# EAGLE board Board (EAGLE 9.7.0)
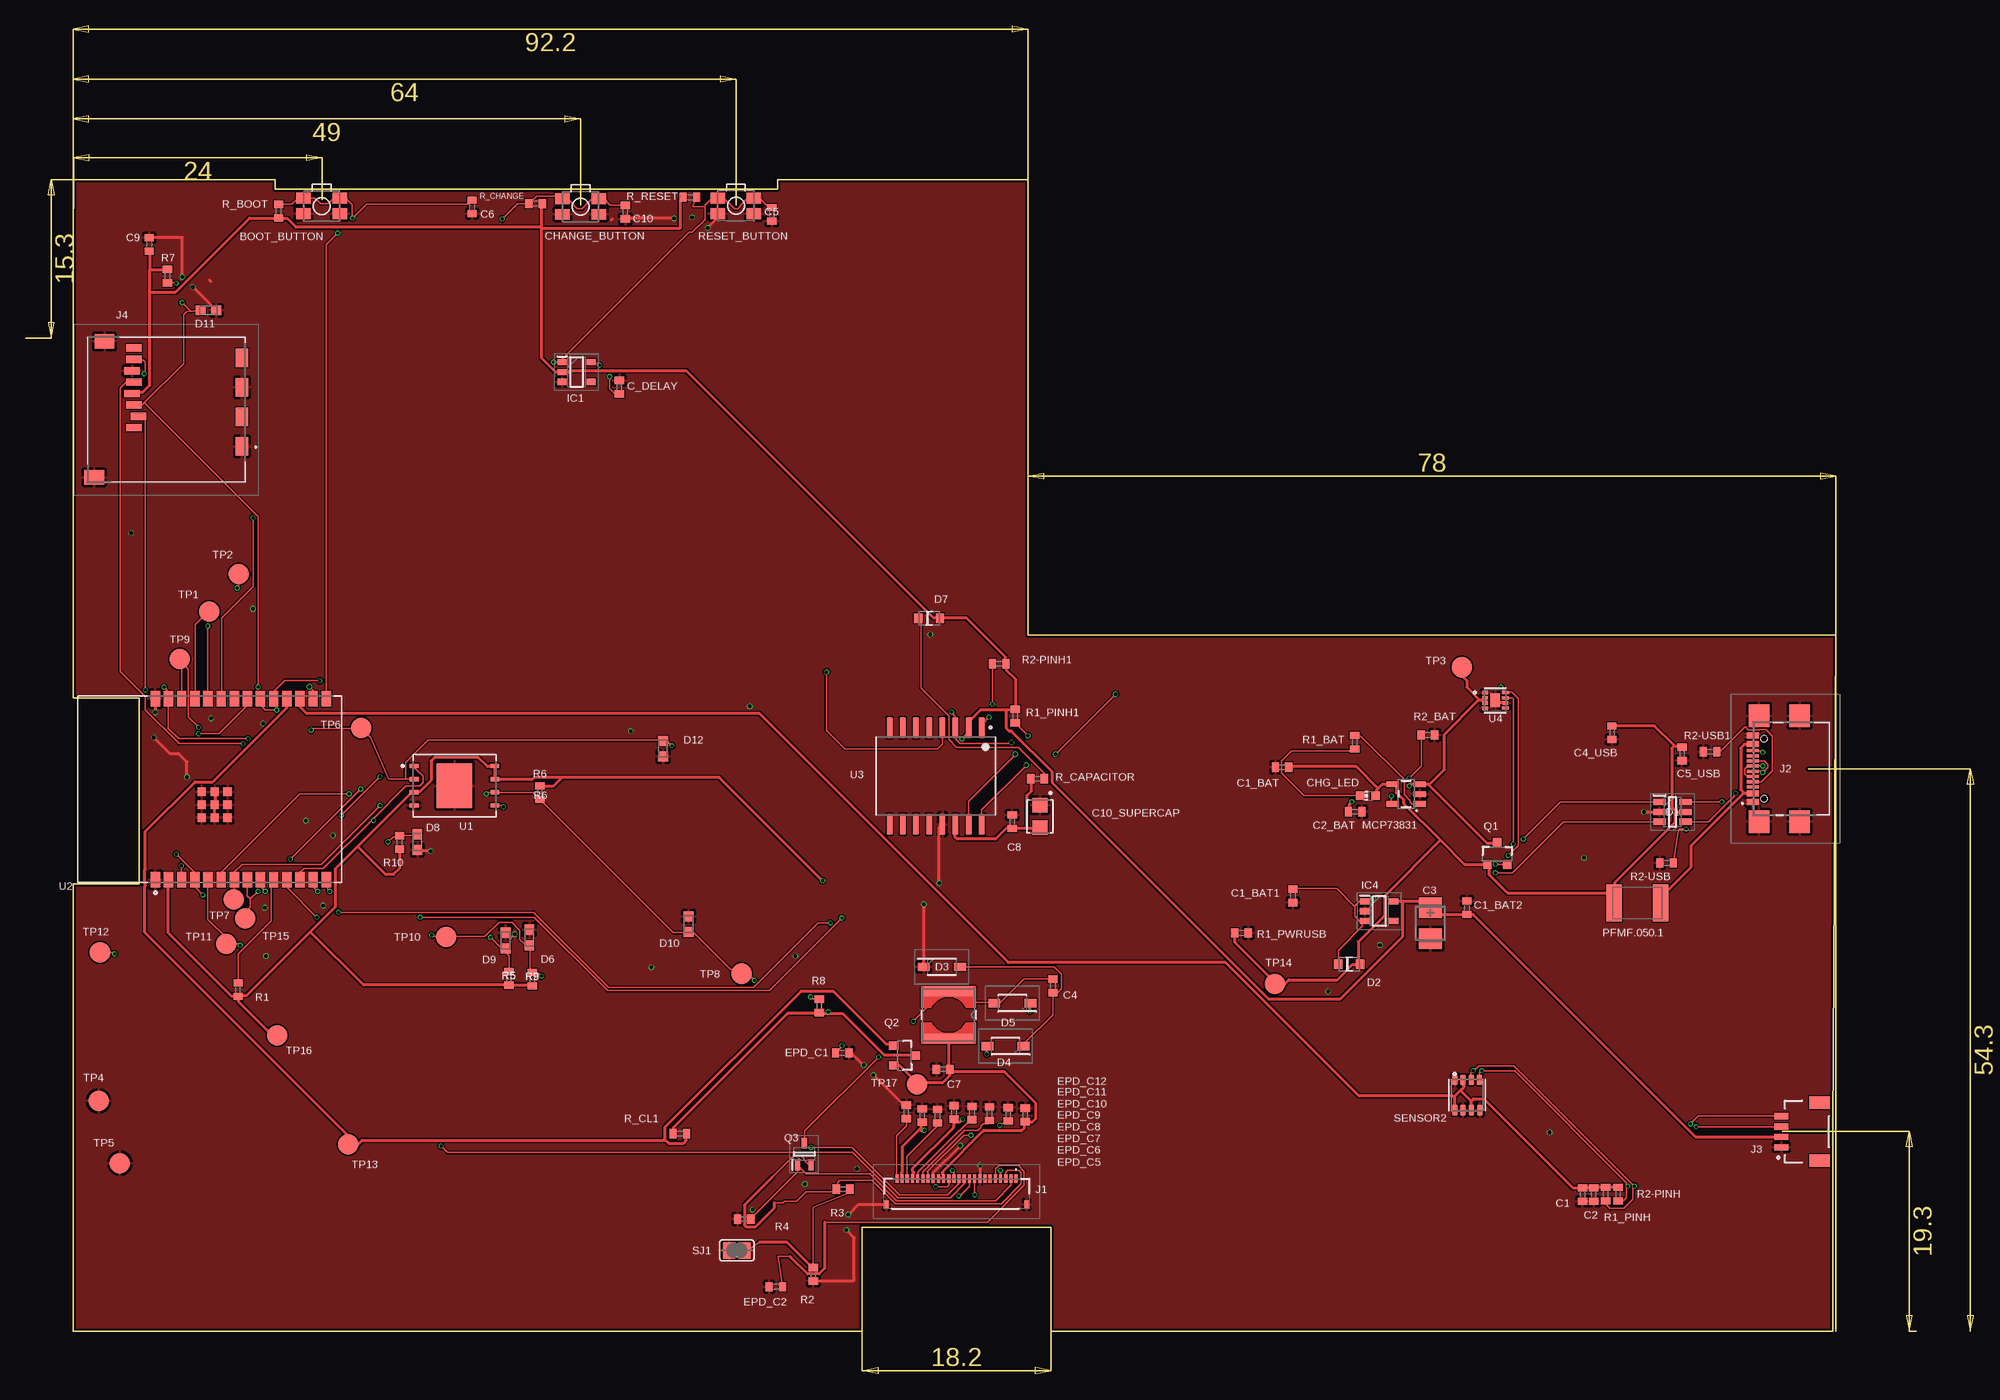
[diagram p0: board, top side]
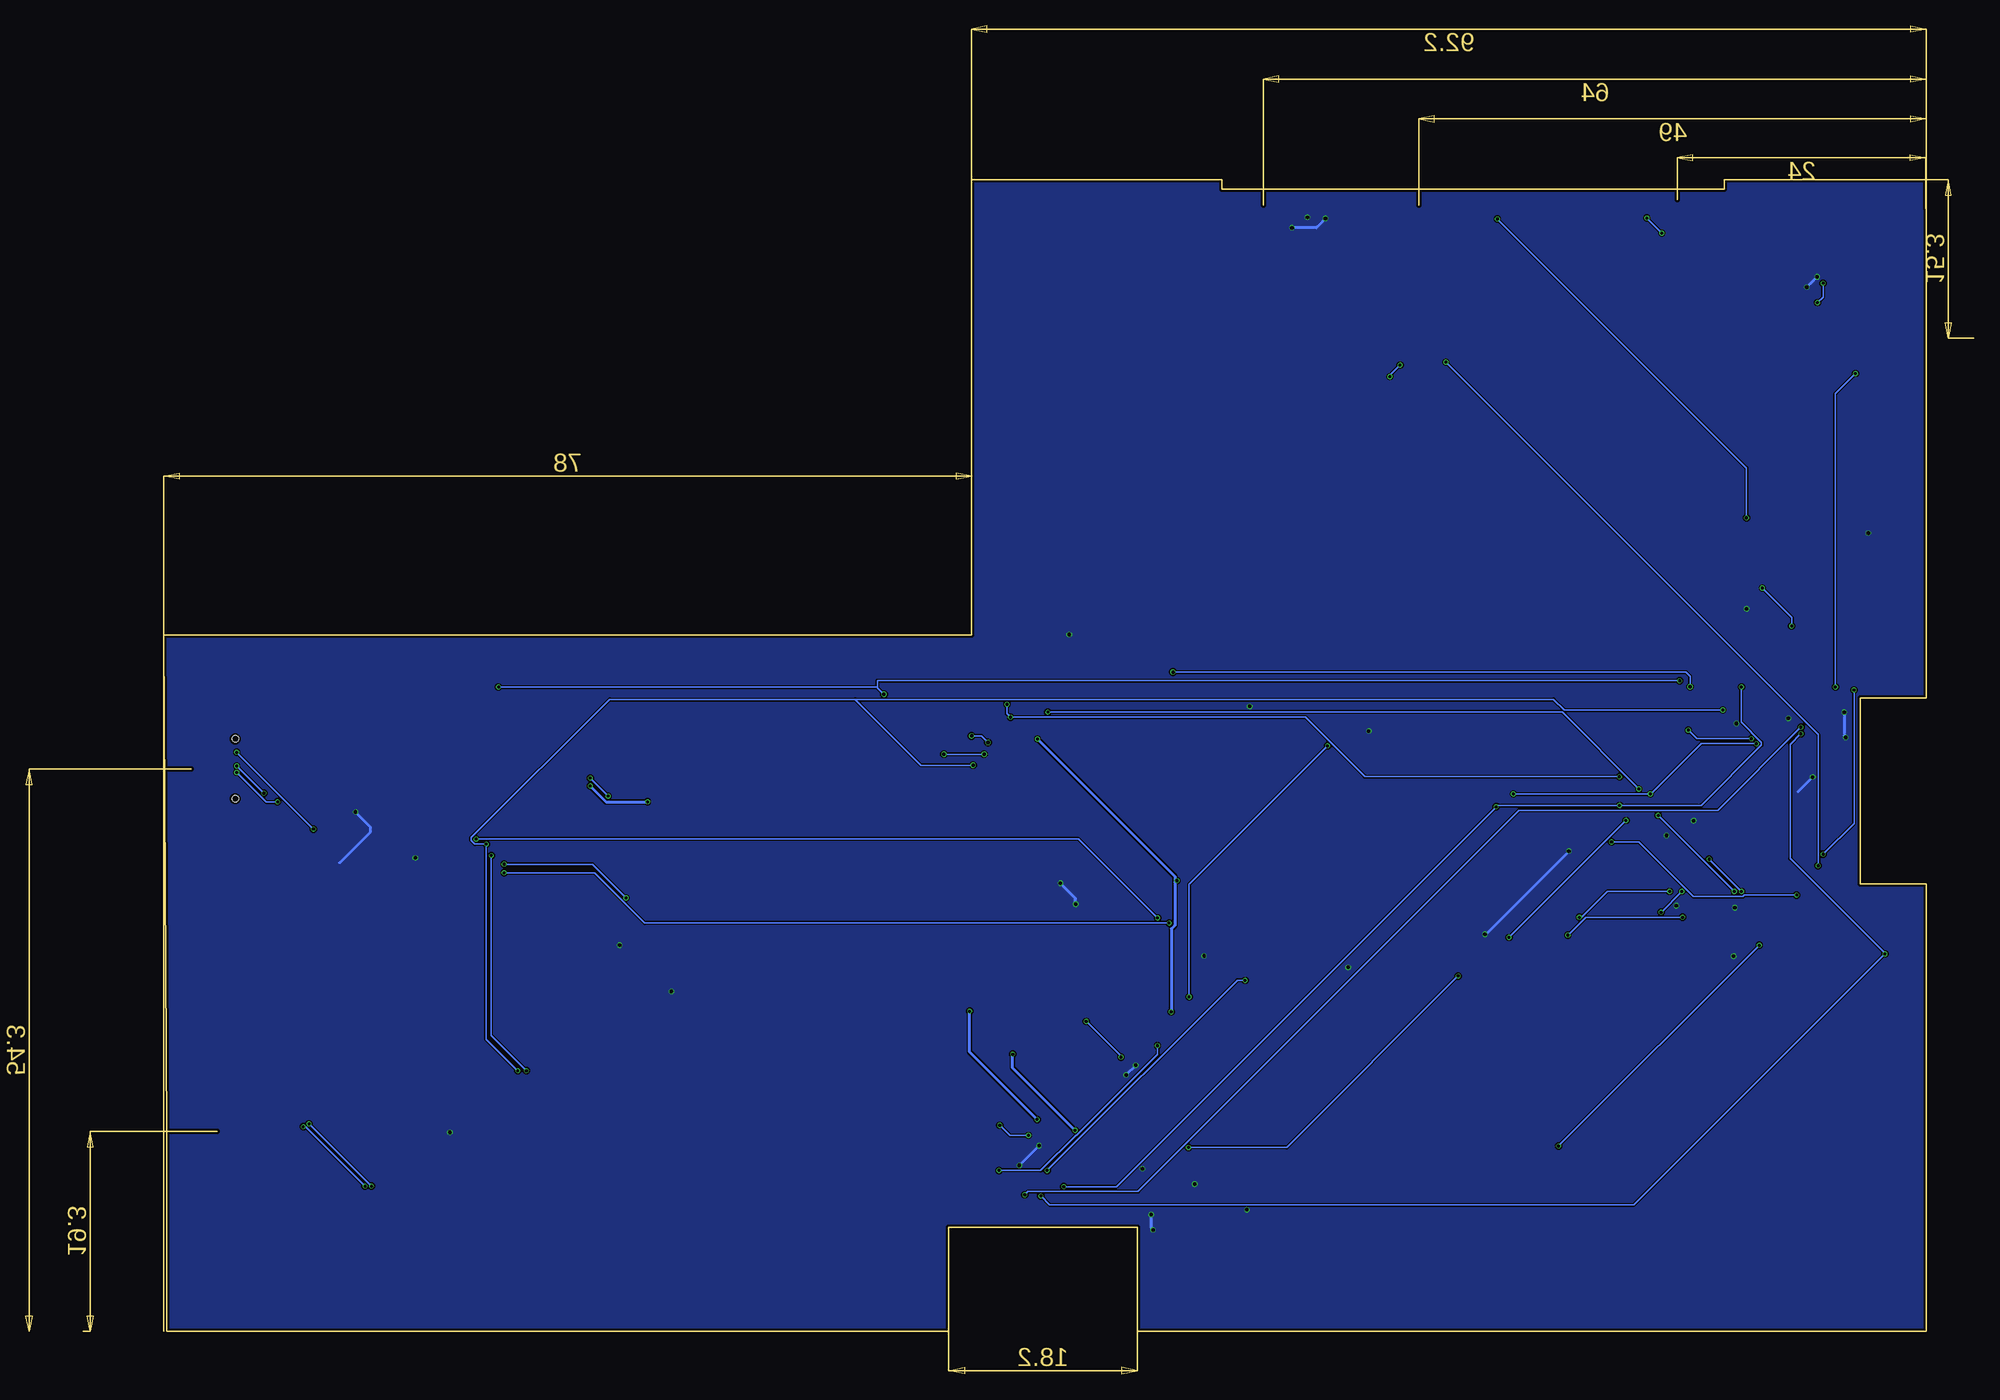
[diagram p1: board, bottom side, seen from below]

Size 170.2 x 111.2 mm. Coordinates in mm from the lower left corner, seen from the top.
Outline: 92.2,111.2 92.2,67.2 170.2,67.2 169.89,19.2 169.89,0 94.4,0 94.4,10 76.2,10 76.2,0 0,0 0,43.2 6.4,43.2 6.4,61.15 0,61.15 0,111.2 19.5,111.2 19.5,110.25 68,110.25 68,111.2 92.2,111.2
Copper layers (1*16): Top 0.035mm / dielectric 1.6mm / Bottom 0.035mm
Design rules "jlcpcb-2layers.dru": minimum track width 0.15mm, minimum drill 0.3mm, track to track 5mil, track to pad 5mil, pad to pad 5mil, via to via 5mil, smd to smd 5mil, copper to edge 0.2mm, drill to drill 6mil, minimum pad ring 10mil, minimum via ring 3mil, stop-mask expansion 4mil, vias tented up to drill 0mil, thermal gap 10mil
Net classes: 1 POWER: width 0.3 mm; 2 SIGNAL: width 0.15 mm

## Footprints (pad centres in the part's own frame; a part is rotated, then mirrored left to right if it is on the bottom)
MYBUTTON = smd 1.4 x 1.05: 1 1.75,0.75; 2 -1.75,0.75; 3 -1.75,-0.75; 4 1.75,-0.75
EAGLE-LTSPICE_C0402 = smd 0.7 x 0.9: 1 -0.65,0; 2 0.65,0
RCL_CT3528 = smd 2 x 2.2: + -1.5,0; - 1.5,0
CAPCP3225X100N = smd 1.4 x 1.4: 1 -1.1,0; 2 1.1,0
ADAFRUIT_CHIP-LED0603 = smd 0.8 x 0.8: A 0,-0.75; C 0,0.75
SOT95P280X145-6N = smd 1.2 x 0.6: 1 -1.25,0.95; 2 -1.25,0; 3 -1.25,-0.95; 4 1.25,-0.95; 5 1.25,0; 6 1.25,0.95
ESP32_WROVER_AVX---SD0805S020S1R0_AVX_SD0805S020S1R0_0 = smd 0.8 x 0.9: 1 -1.05,0; 2 1.05,0
SOD3716X135N = smd 1.15 x 0.8: 1 -1.75,0; 2 1.75,0
DIOC1608X36N = smd 0.97 x 0.94: 1 -0.75,0; 2 0.75,0
SOT95P280X125-5N = smd 0.9 x 0.6: 1 -1.4,0.95; 2 -1.4,0; 3 -1.4,-0.95; 4 1.4,-0.95; 5 1.4,0.95
SOT95P280X120-5N = smd 0.9 x 0.6: 1 -1.4,0.95; 2 -1.4,0; 3 -1.4,-0.95; 4 1.4,-0.95; 5 1.4,0.95
FH34SRJ24S05SH99 = smd 0.3 x 0.8: 1 5.75,1.45; 2 5.25,1.45; 3 4.75,1.45; 4 4.25,1.45; 5 3.75,1.45; 6 3.25,1.45; 7 2.75,1.45; 8 2.25,1.45; 9 1.75,1.45; 10 1.25,1.45; 11 0.75,1.45; 12 0.25,1.45; 13 -0.25,1.45; 14 -0.75,1.45; 15 -1.25,1.45; 16 -1.75,1.45; 17 -2.25,1.45; 18 -2.75,1.45; 19 -3.25,1.45; 20 -3.75,1.45; 21 -4.25,1.45; 22 -4.75,1.45; 23 -5.25,1.45; 24 -5.75,1.45 | smd 0.4 x 0.8: MP1 6.75,-1.05; MP2 -6.75,-1.05
SAMACSYS_PARTS_USB4110GFA = smd 0.3 x 1.15: A1 -3.35,3.678; A4 -2.55,3.678; A5 -1.25,3.678; A6 -0.25,3.678; A7 0.25,3.678; A8 1.25,3.678; A9 2.55,3.678; A12 3.35,3.678; B1 3.05,3.678; B4 2.25,3.678; B5 1.75,3.678; B6 0.75,3.678; B7 -0.75,3.678; B8 -1.75,3.678; B9 -2.25,3.678; B12 -3.05,3.678 | smd 2.18 x 2: MP1 -5.11,-0.827; MP2 5.11,-0.827; MP3 -5.11,3.103; MP4 5.11,3.103 | hole 0.65: -2.89,2.603; 2.89,2.603
JST04_1MM_RA = smd 0.6 x 1.35: 1 -1.5,0; 2 -0.5,0; 3 0.5,0; 4 1.5,0 | smd 1.2 x 2: NC1 2.8,-3.675; NC2 -2.8,-3.675
112ATAARR03ATTEND = smd 1.8 x 1.2: G1 10.6,10.4; G2 4.9,10.4; S1 7.75,10.4; S2 2.05,10.4 | smd 1.4 x 1.9: G3 13.6,-3.85; G4 0.45,-2.85 | smd 0.7 x 1.5: P1 8.8,0; P2 7.7,0.4; P3 6.6,0; P4 5.5,-0.2; P5 4.4,0; P6 3.3,-0.2; P7 2.2,0; P8 1.1,0
IND_4828-WE-TPC_WRE = smd 0.889 x 4.826: 1 -2.286,0; 2 2.286,0
ESP32_WROVER_SPARKFUN-IC-POWER_SOT23-5 = smd 0.55 x 1.2: 1 -0.95,-1.3; 2 0,-1.3; 3 0.95,-1.3; 4 0.95,1.3; 5 -0.95,1.3
ESP32C6_VARISTOR_CT/CN1812 = smd 1.5 x 3.6: 1 -2.25,0; 2 2.25,0
ESP32_WROVER_SPARKFUN-DISCRETESEMI_SOT23-3 = smd 0.8 x 0.9: 1 -0.95,-1; 2 0.95,-1; 3 0,1.1
SOT65P210X110-3N = smd 1.05 x 0.5: 1 -1.05,0.65; 2 -1.05,-0.65; 3 1.05,0
ESP32_WROVER_EAGLE-LTSPICE_R0402 = smd 0.7 x 0.9: 1 -0.65,0; 2 0.65,0
ESP32_WROVER_BME680_PSON80P300X300X100-8N = smd 1.016 x 0.5: 1 1.458,1.2; 2 1.458,0.4; 3 1.458,-0.4; 4 1.458,-1.2; 5 -1.458,-1.22; 6 -1.458,-0.4; 7 -1.458,0.4; 8 -1.458,1.2
SJ = smd 1.168 x 1.6: 1 -0.762,0; 2 0.762,0
TP20R = smd 2 x 2: TP 0,0
SON127P600X800X80-9N = smd 0.94 x 0.44: 1 -3.895,1.905; 2 -3.895,0.635; 3 -3.895,-0.635; 4 -3.895,-1.905; 5 3.895,-1.905; 6 3.895,-0.635; 7 3.895,0.635; 8 3.895,1.905 | smd 3.4 x 4.3: 9 0,0
XCVR_ESP32-C6-WROOM-1-N8 = smd 1.5 x 0.9: 1 -8.75,5.26; 2 -8.75,3.99; 3 -8.75,2.72; 4 -8.75,1.45; 5 -8.75,0.18; 6 -8.75,-1.09; 7 -8.75,-2.36; 8 -8.75,-3.63; 9 -8.75,-4.9; 10 -8.75,-6.17; 11 -8.75,-7.44; 12 -8.75,-8.71; 13 -8.75,-9.98; 14 -8.75,-11.25; 15 8.75,-11.25; 16 8.75,-9.98; 17 8.75,-8.71; 18 8.75,-7.44; 19 8.75,-6.17; 20 8.75,-4.9; 21 8.75,-3.63; 22 8.75,-2.36; 23 8.75,-1.09; 24 8.75,0.18; 25 8.75,1.45; 26 8.75,2.72; 27 8.75,3.99; 28 8.75,5.26 | smd 0.8 x 0.8: 29_1 -2.755,0.79; 29_2 -1.505,0.79; 29_3 -0.255,0.79; 29_4 -2.755,-0.46; 29_5 -1.505,-0.46; 29_6 -0.255,-0.46; 29_7 -2.755,-1.71; 29_8 -1.505,-1.71; 29_9 -0.255,-1.71
SOIC127P1032X265-16N = smd 2.05 x 0.59: 1 -4.655,4.445; 2 -4.655,3.175; 3 -4.655,1.905; 4 -4.655,0.635; 5 -4.655,-0.635; 6 -4.655,-1.905; 7 -4.655,-3.175; 8 -4.655,-4.445; 9 4.655,-4.445; 10 4.655,-3.175; 11 4.655,-1.905; 12 4.655,-0.635; 13 4.655,0.635; 14 4.655,1.905; 15 4.655,3.175; 16 4.655,4.445
SON50P200X200X80-9N = smd 0.6 x 0.35: 1 -0.985,0.75; 2 -0.985,0.25; 3 -0.985,-0.25; 4 -0.985,-0.75; 6 0.985,-0.25 | smd 0.76 x 0.27: 5 0.985,-0.75; 7 0.985,0.25; 8 0.985,0.75 | smd 0.9 x 1.3: 9 0,0

## Placement (x,y rotation side)
BOOT_BUTTON  BUTTON_CUSYOMV1  [MYBUTTON]  24,108.63 180 top
C1  100nF  [EAGLE-LTSPICE_C0402]  145.74,13.19 270 top
C1_BAT  4.7Uf  [EAGLE-LTSPICE_C0402]  116.73,54.46 180 top
C1_BAT1  4.7uF  [EAGLE-LTSPICE_C0402]  117.78,42.03 270 top
C1_BAT2  4.7uF  [EAGLE-LTSPICE_C0402]  134.57,40.88 90 top
C2  100nF  [EAGLE-LTSPICE_C0402]  146.82,13.19 270 top
C2_BAT  4.7uF  [EAGLE-LTSPICE_C0402]  123.79,50.16 0 top
C3  100uF TANT  [RCL_CT3528]  131.05,39.39 270 top
C4  4.7uF/25V  [EAGLE-LTSPICE_C0402]  94.61,33.33 90 top
C4_USB  100nF  [EAGLE-LTSPICE_C0402]  148.58,57.78 270 top
C5  1uF  [EAGLE-LTSPICE_C0402]  67.47,107.82 270 top
C5_USB  4.7uF  [EAGLE-LTSPICE_C0402]  155.34,55.73 270 top
C6  100nF  [EAGLE-LTSPICE_C0402]  38.54,108.54 270 top
C7  10uF  [EAGLE-LTSPICE_C0402]  84,25.28 180 top
C8  100nF  [EAGLE-LTSPICE_C0402]  90.68,49.19 90 top
C9  100nF  [EAGLE-LTSPICE_C0402]  7.36,104.94 90 top
C10  100nF  [EAGLE-LTSPICE_C0402]  53.34,108.04 270 top
C10_SUPERCAP  CPH3225A  [CAPCP3225X100N]  93.36,49.7 270 top
C_DELAY  100nF  [EAGLE-LTSPICE_C0402]  52.76,91.15 90 top
CHANGE_BUTTON  BUTTON_CUSYOMV1  [MYBUTTON]  49,108.58 180 top
CHG_LED  [ADAFRUIT_CHIP-LED0603]  125.03,51.7 90 top
D1  USBLC6-2SC6Y  [SOT95P280X145-6N]  154.43,50.13 0 top
D2  ESP32_WROVER_AVX---SD0805S020S1R0_AVX_SD0805S020S1R0_0_0AVX_SD0805S020S1R0_0_0  [ESP32_WROVER_AVX---SD0805S020S1R0_AVX_SD0805S020S1R0_0]  123.21,35.44 0 top
D3  MBR0530  [SOD3716X135N]  83.89,35.17 0 top
D4  MBR0530  [SOD3716X135N]  90.03,27.51 180 top
D5  MBR0530  [SOD3716X135N]  90.69,31.66 180 top
D6  PGB1010603MR  [DIOC1608X36N]  44.07,38.01 90 top
D7  ESP32_WROVER_AVX---SD0805S020S1R0_AVX_SD0805S020S1R0_0_0AVX_SD0805S020S1R0_0_0  [ESP32_WROVER_AVX---SD0805S020S1R0_AVX_SD0805S020S1R0_0]  82.66,68.84 0 top
D8  PGB1010603MR  [DIOC1608X36N]  33.26,47.23 270 top
D9  PGB1010603MR  [DIOC1608X36N]  41.76,37.72 90 top
D10  PGB1010603MR  [DIOC1608X36N]  59.44,39.31 90 top
D11  PGB1010603MR  [DIOC1608X36N]  13.08,98.57 0 top
D12  PGB1010603MR  [DIOC1608X36N]  56.96,56.25 270 top
EPD_C1  1uF/50V  [EAGLE-LTSPICE_C0402]  74.28,26.87 0 top
EPD_C2  1uF/50V  [EAGLE-LTSPICE_C0402]  67.86,4.28 180 top
EPD_C5  0.1uF/50V  [EAGLE-LTSPICE_C0402]  91.95,20.88 90 top
EPD_C6  1uF/50V  [EAGLE-LTSPICE_C0402]  90.28,20.94 90 top
EPD_C7  1uF/50V  [EAGLE-LTSPICE_C0402]  88.49,21 90 top
EPD_C8  1uF/50V  [EAGLE-LTSPICE_C0402]  86.8,21.06 90 top
EPD_C9  1uF/50V  [EAGLE-LTSPICE_C0402]  85.06,21.12 90 top
EPD_C10  1uF/50V  [EAGLE-LTSPICE_C0402]  83.46,20.76 90 top
EPD_C11  1uF/50V  [EAGLE-LTSPICE_C0402]  81.99,20.82 90 top
EPD_C12  1uF/50V  [EAGLE-LTSPICE_C0402]  80.45,21.18 90 top
IC1  BD5229G-TR  [SOT95P280X125-5N]  48.62,92.6 0 top
IC4  XC6220A331MR-G  [SOT95P280X120-5N]  126.11,40.55 0 top
J1  FH34SRJ-24S-0.5SH_99_  [FH34SRJ24S05SH99]  85.3,13.27 0 top
J2  SAMACSYS_PARTS_USB4110-GF-A  [SAMACSYS_PARTS_USB4110GFA]  165.88,54.3 90 top
J3  QWIIC_RIGHT_ANGLE  [JST04_1MM_RA]  164.94,19.25 90 top
J4  112A-TAAR-R03_ATTEND  [112ATAARR03ATTEND]  5.9,96.03 270 top
L1  744043680IND_4828-WE-TPC_WRE  [IND_4828-WE-TPC_WRE]  84.54,30.53 270 top
MCP73831  ESP32_WROVER_SPARKFUN-IC-POWER_MCP73831  [ESP32_WROVER_SPARKFUN-IC-POWER_SOT23-5]  128.72,51.85 90 top
PFMF.050.1  ESP32C6_VARISTORCN1812  [ESP32C6_VARISTOR_CT/CN1812]  151.03,41.34 180 top
Q1  20V/4.2A/52mΩ/1.4W  [ESP32_WROVER_SPARKFUN-DISCRETESEMI_SOT23-3]  137.51,46.06 0 top
Q2  20V/4.2A/52mΩ/1.4W  [ESP32_WROVER_SPARKFUN-DISCRETESEMI_SOT23-3]  80.25,26.61 270 top
Q3  SI1308EDL-T1-GE3  [SOT65P210X110-3N]  70.6,17.1 90 top
R1  10K  [ESP32_WROVER_EAGLE-LTSPICE_R0402]  15.94,32.96 90 top
R1_BAT  200  [ESP32_WROVER_EAGLE-LTSPICE_R0402]  123.75,56.86 270 top
R1_PINH  10K  [ESP32_WROVER_EAGLE-LTSPICE_R0402]  147.96,13.23 90 top
R1_PINH1  10K  [ESP32_WROVER_EAGLE-LTSPICE_R0402]  90.96,59.4 90 top
R1_PWRUSB  100K  [ESP32_WROVER_EAGLE-LTSPICE_R0402]  112.82,38.45 180 top
R2  2.2  [ESP32_WROVER_EAGLE-LTSPICE_R0402]  71.47,5.49 90 top
R2-PINH  10K  [ESP32_WROVER_EAGLE-LTSPICE_R0402]  149.17,13.23 90 top
R2-PINH1  10K  [ESP32_WROVER_EAGLE-LTSPICE_R0402]  89.43,64.45 0 top
R2-USB  5K1  [ESP32_WROVER_EAGLE-LTSPICE_R0402]  153.86,45.21 180 top
R2-USB1  5K1  [ESP32_WROVER_EAGLE-LTSPICE_R0402]  158.05,55.93 0 top
R2_BAT  2K  [ESP32_WROVER_EAGLE-LTSPICE_R0402]  130.81,57.56 180 top
R3  0.47  [ESP32_WROVER_EAGLE-LTSPICE_R0402]  74.35,13.7 180 top
R4  10k  [ESP32_WROVER_EAGLE-LTSPICE_R0402]  64.8,10.82 180 top
R5  10K  [ESP32_WROVER_EAGLE-LTSPICE_R0402]  42.08,34.06 270 top
R6  10K  [ESP32_WROVER_EAGLE-LTSPICE_R0402]  45.08,51.99 90 top
R7  10K  [ESP32_WROVER_EAGLE-LTSPICE_R0402]  9.11,101.86 90 top
R8  10K  [ESP32_WROVER_EAGLE-LTSPICE_R0402]  72.05,31.4 270 top
R9  10K  [ESP32_WROVER_EAGLE-LTSPICE_R0402]  44.36,33.98 270 top
R10  10K  [ESP32_WROVER_EAGLE-LTSPICE_R0402]  31.53,47.19 270 top
R_BOOT  10K  [ESP32_WROVER_EAGLE-LTSPICE_R0402]  19.86,108.13 90 top
R_CAPACITOR  15  [ESP32_WROVER_EAGLE-LTSPICE_R0402]  93.12,53.35 0 top
R_CHANGE  10K  [ESP32_WROVER_EAGLE-LTSPICE_R0402]  44.67,108.86 179.6 top
R_CL1  10K  [ESP32_WROVER_EAGLE-LTSPICE_R0402]  58.59,19.06 0 top
R_RESET  10K  [ESP32_WROVER_EAGLE-LTSPICE_R0402]  59.56,109.49 0 top
RESET_BUTTON  BUTTON_CUSYOMV1  [MYBUTTON]  64,108.65 180 top
SENSOR2  ESP32_WROVER_BME680_BME680  [ESP32_WROVER_BME680_PSON80P300X300X100-8N]  134.6,22.8 90 top
SJ1  [SJ]  64.09,7.79 0 top
TP1  TPTP20R  [TP20R]  13.14,69.47 19.4 top
TP2  TPTP20R  [TP20R]  15.99,73.12 0 top
TP3  TPTP20R  [TP20R]  134.07,64.1 0 top
TP4  TPTP20R  [TP20R]  2.47,22.22 0 top
TP5  TPTP20R  [TP20R]  4.52,16.22 0 top
TP6  TPTP20R  [TP20R]  27.84,58.23 0 top
TP7  TPTP20R  [TP20R]  15.51,41.67 0 top
TP8  TPTP20R  [TP20R]  64.53,34.52 90 top
TP9  TPTP20R  [TP20R]  10.3,64.91 173.9 top
TP10  TPTP20R  [TP20R]  36.02,38.08 0 top
TP11  TPTP20R  [TP20R]  14.77,37.39 0 top
TP12  TPTP20R  [TP20R]  2.6,36.57 0 top
TP13  TPTP20R  [TP20R]  26.58,18.02 0 top
TP14  TPTP20R  [TP20R]  116.03,33.52 0 top
TP15  TPTP20R  [TP20R]  16.61,39.83 0 top
TP16  TPTP20R  [TP20R]  19.7,28.54 0 top
TP17  TPTP20R  [TP20R]  81.49,23.84 0 top
U1  W25Q512JVEIQ  [SON127P600X800X80-9N]  36.83,52.66 0 top
U2  ESP32-C6-WROOM-1-N8  [XCVR_ESP32-C6-WROOM-1-N8]  13.21,52.33 90 top
U3  DS3231SN#  [SOIC127P1032X265-16N]  83.29,53.6 270 top
U4  MAX17048G+T10  [SON50P200X200X80-9N]  137.31,60.9 0 top

## Library data of the parts
BOOT_BUTTON CHANGE_BUTTON CHG_LED PFMF.050.1 RESET_BUTTON SJ1 TP1-TP17 = DeskAssistant v19 v1
C1 C1_BAT C1_BAT1 C1_BAT2 C2 C2_BAT C4 C4_USB C5 C5_USB C6-C10 C_DELAY EPD_C1 EPD_C2 EPD_C5-EPD_C12 = DeskAssistant v19 v1; SPICEMODEL: NONE; SPICEPREFIX: C
C3 = DeskAssistant v19 v1; SPICEPREFIX: C
C10_SUPERCAP = DeskAssistant v19 v1; AVAILABILITY: Not in stock; CHECK_PRICES: https://www.snapeda.com/parts/CPH3225A/Seiko+Instruments/view-part/?ref=eda; DESCRIPTION: 11 mF (EDLC) Supercapacitor 3.3 V 1210 (3225 Metric) - -; MF: Seiko Instruments; MP: CPH3225A; PACKAGE: 1210 Seiko; PRICE: None; PURCHASE-URL: https://www.snapeda.com/api/url_track_click_mouser/?unipart_id=562593&manufacturer=Seiko Instruments&part_name=CPH3225A&search_term=None; SNAPEDA_LINK: https://www.snapeda.com/parts/CPH3225A/Seiko+Instruments/view-part/?ref=snap
D1 = DeskAssistant v19 v1; AVAILABILITY: In Stock; CHECK_PRICES: https://www.snapeda.com/parts/USBLC6-2SC6Y/STMicroelectronics/view-part/?ref=eda; DESCRIPTION: 17V Clamp 5A (8/20µs) Ipp Tvs Diode Surface Mount SOT-23-6; MF: STMicroelectronics; MP: USBLC6-2SC6Y; PACKAGE: SOT-23-6 STMicroelectronics; PRICE: None; SNAPEDA_LINK: https://www.snapeda.com/parts/USBLC6-2SC6Y/STMicroelectronics/view-part/?ref=snap
D2 D7 = DeskAssistant v19 v1; CENTROID_NOT_SPECIFIED: No; DATASHEET: http://datasheets.avx.com/schottky.pdf; DIGIKEY_DESCRIPTION: DIODE SCHOTTKY 20V 1A 0805; DIGIKEY_PART_NUMBER: 478-7800-1-ND; LEAD_FREE: yes; MF: AVX; MOUSER_PART_NUMBER: 581-SD0805S020S1R0; PACKAGE: 0805 (2012 metric); PREFIX: D; ROHS: yes; TEMPERATURE_RANGE_HIGH: +125°C; TEMPERATURE_RANGE_LOW: -55°C
D3-D5 = DeskAssistant v19 v1; AVAILABILITY: In Stock; CHECK_PRICES: https://www.snapeda.com/parts/MBR0530/Onsemi/view-part/?ref=eda; DESCRIPTION: Diode Schottky 30 V 500mA Surface Mount SOD-123; MF: ON Semiconductor; MP: MBR0530; PACKAGE: SOD-123-2 ON Semiconductor; PRICE: None; PURCHASE-URL: https://www.snapeda.com/api/url_track_click_mouser/?unipart_id=179458&manufacturer=ON Semiconductor&part_name=MBR0530&search_term=None; SNAPEDA_LINK: https://www.snapeda.com/parts/MBR0530/Onsemi/view-part/?ref=snap
D6 D8-D12 = DeskAssistant v19 v1; AVAILABILITY: In Stock; CHECK_PRICES: https://www.snapeda.com/parts/PGB1010603MR/Littelfuse/view-part/?ref=eda; DESCRIPTION: 150V (Typ) Clamp - Ipp Tvs Diode Surface Mount 0603 (1608 Metric); MF: Littelfuse Inc.; MP: PGB1010603MR; PACKAGE: 0603 Littelfuse Inc.; PRICE: None; PURCHASE-URL: https://www.snapeda.com/api/url_track_click_mouser/?unipart_id=5659453&manufacturer=Littelfuse Inc.&part_name=PGB1010603MR&search_term=None; SNAPEDA_LINK: https://www.snapeda.com/parts/PGB1010603MR/Littelfuse/view-part/?ref=snap
IC1 = DeskAssistant v19 v1; DESCRIPTION: Voltage Detector with Adjustable Delay Time: CMOS processes are utilized to develop high precision, low current consumption CMOS reset ICs that allow arbitrary setting of the delay time. The extensive lineup includes both Nch Open Drain and CMOS output types in a wide range of detection voltages (from 2.3V to 6.0V, in 0.1V steps), enabling selection of the ideal solution based on customer requirements. In addition, the entire series is of course both lead-free and RoHS-compliant.; HEIGHT: 1.25mm; MANUFACTURER_NAME: ROHM Semiconductor; MANUFACTURER_PART_NUMBER: BD5229G-TR; MOUSER_PART_NUMBER: 755-BD5229G-TR; MOUSER_PRICE-STOCK: https://www.mouser.co.uk/ProductDetail/ROHM-Semiconductor/BD5229G-TR?qs=4kLU8WoGk0vvnhrrYwdszw%3D%3D
IC4 = DeskAssistant v19 v1; DESCRIPTION: LDO Voltage Regulators; HEIGHT: 1.2mm; MANUFACTURER_NAME: Torex; MANUFACTURER_PART_NUMBER: XC6220A331MR-G; MOUSER_PART_NUMBER: 865-XC6220A331MR-G; MOUSER_PRICE-STOCK: https://www.mouser.co.uk/ProductDetail/Torex-Semiconductor/XC6220A331MR-G?qs=AsjdqWjXhJ8ZSWznL1J0gg%3D%3D
J1 = DeskAssistant v19 v1; DESCRIPTION: 24 Position FFC, FPC Connector Contacts, Top and Bottom 0.020" (0.50mm) Surface Mount, Right Angle; HEIGHT: 1.1mm; MANUFACTURER_NAME: Hirose; MANUFACTURER_PART_NUMBER: FH34SRJ-24S-0.5SH(99); MOUSER_PART_NUMBER: 798-FH34SRJ24S05SH99; MOUSER_PRICE-STOCK: https://www.mouser.co.uk/ProductDetail/Hirose-Connector/FH34SRJ-24S-0.5SH99?qs=vcbW%252B4%252BSTIpKBl5ap9J8Fw%3D%3D
J2 = DeskAssistant v19 v1; DESCRIPTION: CONN USB 2.0 TYPE-C R/A SMT; HEIGHT: 3.26mm; MANUFACTURER_NAME: GCT (GLOBAL CONNECTOR TECHNOLOGY); MANUFACTURER_PART_NUMBER: USB4110-GF-A; MOUSER_PART_NUMBER: 640-USB4110-GF-A; MOUSER_PRICE-STOCK: https://www.mouser.co.uk/ProductDetail/GCT/USB4110-GF-A?qs=KUoIvG%2F9IlYiZvIXQjyJeA%3D%3D
J3 = DeskAssistant v19 v1; PROD_ID: CONN-13694
J4 = DeskAssistant v19 v1; DESCRIPTION: Micro SD Card Socket, Push-Push Type, Top Mount, SMT, H=1.83mm, 10u; HEIGHT: 1.9mm; MANUFACTURER_NAME: ATTEND; MANUFACTURER_PART_NUMBER: 112A-TAAR-R03 ATTEND
L1 = DeskAssistant v19 v1; COPYRIGHT: Copyright (C) 2024 Ultra Librarian. All rights reserved.; MANUFACTURER_PART_NUMBER: 744043680; MFR_NAME: Wurth Electronics
MCP73831 = DeskAssistant v19 v1; PROD_ID: IC-09995
Q1 Q2 = DeskAssistant v19 v1; PROD_ID: TRAN-14388
Q3 = DeskAssistant v19 v1; AVAILABILITY: In Stock; CHECK_PRICES: https://www.snapeda.com/parts/SI1308EDL-T1-GE3/Vishay+Siliconix/view-part/?ref=eda; DESCRIPTION: Si1308EDL-T1-GE3 N-channel MOSFET Transistor, 1.5 A, 30 V, 3-Pin SC-70 | Siliconix / Vishay SI1308EDL-T1-GE3; MF: Vishay Siliconix; MP: SI1308EDL-T1-GE3; PACKAGE: SOT-323 Vishay Semiconductor; PRICE: None; PURCHASE-URL: https://www.snapeda.com/api/url_track_click_mouser/?unipart_id=274603&manufacturer=Vishay Siliconix&part_name=SI1308EDL-T1-GE3&search_term=None; SNAPEDA_LINK: https://www.snapeda.com/parts/SI1308EDL-T1-GE3/Vishay+Siliconix/view-part/?ref=snap
R1 R1_BAT R1_PINH R1_PINH1 R1_PWRUSB R2 R2-PINH R2-PINH1 R2-USB R2-USB1 R2_BAT R3-R10 R_BOOT R_CAPACITOR R_CHANGE R_CL1 R_RESET = DeskAssistant v19 v1; SPICEMODEL: NONE; SPICEPREFIX: R
SENSOR2 = DeskAssistant v19 v1; AVAILABILITY: Unavailable; DESCRIPTION: Integrated Environmental Unit; MF: Bosch Sensortec; MP: BME680; PACKAGE: LGA-8 Bosch Tools; PRICE: None
U1 = DeskAssistant v19 v1; AVAILABILITY: In Stock; CHECK_PRICES: https://www.snapeda.com/parts/W25Q512JVEIQ/Winbond+Electronics/view-part/?ref=eda; DESCRIPTION: FLASH - NOR Memory IC 512Mb (64M x 8) SPI - Quad I/O 133 MHz 8-WSON (8x6); MF: Winbond Electronics; MP: W25Q512JVEIQ; PACKAGE: Package; PRICE: None; SNAPEDA_LINK: https://www.snapeda.com/parts/W25Q512JVEIQ/Winbond+Electronics/view-part/?ref=snap
U2 = DeskAssistant v19 v1; AVAILABILITY: In Stock; CHECK_PRICES: https://www.snapeda.com/parts/ESP32-C6-WROOM-1-N8/Espressif+Systems/view-part/?ref=eda; DESCRIPTION: Multiprotocol Modules ESP32-C6 module, Wi-Fi 6 in 2.4 GHz band, Bluetooth 5, Zigbee 3.0 and Thread. ESP34-WROOM Compatible - ENGINEERING SAMPLE; MF: Espressif Systems; MP: ESP32-C6-WROOM-1-N8; PACKAGE: None; PRICE: None; SNAPEDA_LINK: https://www.snapeda.com/parts/ESP32-C6-WROOM-1-N8/Espressif+Systems/view-part/?ref=snap
U3 = DeskAssistant v19 v1; AVAILABILITY: In Stock; CHECK_PRICES: https://www.snapeda.com/parts/DS3231SN%23/Analog+Devices/view-part/?ref=eda; DESCRIPTION: Extremely Accurate I²C-Integrated RTC/TCXO/Crystal; MF: Analog Devices; MP: DS3231SN#; PACKAGE: SOIC-16 Maxim; PRICE: None; PURCHASE-URL: https://www.snapeda.com/api/url_track_click_mouser/?unipart_id=99048&manufacturer=Analog Devices&part_name=DS3231SN#&search_term=None; SNAPEDA_LINK: https://www.snapeda.com/parts/DS3231SN%23/Analog+Devices/view-part/?ref=snap
U4 = DeskAssistant v19 v1; AVAILABILITY: In Stock; CHECK_PRICES: https://www.snapeda.com/parts/MAX17048G+T10/Analog+Devices/view-part/?ref=eda; DESCRIPTION: 3µA 1-Cell/2-Cell Fuel Gauge with ModelGauge; MF: Analog Devices; MP: MAX17048G+T10; PACKAGE: TDFN-8 Maxim; PRICE: None; PURCHASE-URL: https://www.snapeda.com/api/url_track_click_mouser/?unipart_id=329239&manufacturer=Analog Devices&part_name=MAX17048G+T10&search_term=None; SNAPEDA_LINK: https://www.snapeda.com/parts/MAX17048G+T10/Analog+Devices/view-part/?ref=snap

## Nets
3V3 [POWER]: C1_BAT2.1 C3.+ C9.1 D7.2 IC1.2 IC4.5 J3.2 J4.P4 Q2.3 R1.1 R1_PINH1.2 R2-PINH1.2 R5.2 R6.2 R7.2 R8.2 R9.2 R10.2 R_BOOT.1 R_CHANGE.1 R_CL1.1 R_RESET.1 TP16.TP U1.3 U1.7 U1.8 U2.2 U3.2
32KHZ [SIGNAL]: R2-PINH1.1 U2.9 U3.1
DN [SIGNAL]: D1.4 J2.A7 J2.B7
DP [SIGNAL]: D1.6 J2.A6 J2.B6
EPD_3V3 [POWER]: C7.1 EPD_C5.1 J1.15 J1.16 L1.2 Q2.2 TP17.TP
EPD_3V3_C [POWER]: Q2.1 R_CL1.2 TP13.TP U2.18
EPD_BUSY [SIGNAL]: J1.9 TP9.TP U2.26
EPD_CS [SIGNAL]: D6.1 J1.12 R9.1 TP10.TP U2.11
EPD_DC [SIGNAL]: J1.11 TP11.TP U2.5
EPD_RST [SIGNAL]: J1.10 TP12.TP U2.21
FLASH_CS [SIGNAL]: D9.1 R5.1 U1.1 U2.12
GDR [SIGNAL]: J1.2 Q3.1 R4.1
GND [POWER]: BOOT_BUTTON.1 BOOT_BUTTON.2 C1.2 C1_BAT1.2 C1_BAT2.2 C1_BAT.2 C2.2 C2_BAT.2 C3.- C4_USB.2 C5.2 C5_USB.2 C6.2 C7.2 C8.2 C9.2 C10.2 C10_SUPERCAP.1 C_DELAY.2 CHANGE_BUTTON.1 CHANGE_BUTTON.2 D1.2 D3.1 D6.2 D8.2 D9.2 D10.2 D11.2 D12.2 EPD_C1.2 EPD_C2.2 EPD_C5.2 EPD_C6.2 EPD_C7.2 EPD_C8.2 EPD_C9.2 EPD_C10.2 EPD_C11.2 EPD_C12.2 IC1.3 IC4.2 J1.8 J1.17 J1.MP1 J1.MP2 J2.A1 J2.A12 J2.B1 J2.B12 J2.MP1 J2.MP2 J2.MP3 J2.MP4 J3.1 J4.G1 J4.G2 J4.G3 J4.G4 J4.P6 MCP73831.2 R1_PWRUSB.1 R2-USB1.1 R2-USB.2 R2.1 R2_BAT.1 R4.2 RESET_BUTTON.1 RESET_BUTTON.2 SENSOR2.1 SENSOR2.5 SENSOR2.7 SJ1.1 TP4.TP TP5.TP U1.4 U1.9 U2.1 U2.28 U2.29_1 U2.29_2 U2.29_3 U2.29_4 U2.29_5 U2.29_6 U2.29_7 U2.29_8 U2.29_9 U3.13 U4.1 U4.4 U4.6 U4.9
GPIO8 [SIGNAL]: R1.2 U2.10
I2C_PW [POWER]: C1.1 C2.1 R1_PINH.2 R2-PINH.2 SENSOR2.2 SENSOR2.6 SENSOR2.8 U2.17
INT_RTC [SIGNAL]: R1_PINH1.1 TP15.TP U2.8 U3.3
IO/BOOT [SIGNAL]: BOOT_BUTTON.3 BOOT_BUTTON.4 C6.1 R_BOOT.2 U2.15
IO/CHANGE [SIGNAL]: C10.1 CHANGE_BUTTON.3 CHANGE_BUTTON.4 R_CHANGE.2 U2.23
MISO [SIGNAL]: D12.1 J4.P7 R8.1 TP6.TP U1.2 U2.27
MOSI [SIGNAL]: D11.1 J1.14 J4.P3 R7.1 TP7.TP U1.5 U2.7
N$1 [SIGNAL]: J2.B5 R2-USB.1
N$2 [SIGNAL]: MCP73831.1 R1_BAT.1
N$3 [SIGNAL]: C1_BAT1.1 D2.1 IC4.1 IC4.3 Q1.2
N$4 [SIGNAL]: MCP73831.5 R2_BAT.2
N$5 [SIGNAL]: C4.1 D3.2 D4.1
N$6 [SIGNAL]: CHG_LED.C R1_BAT.2
N$7 [SIGNAL]: C_DELAY.1 IC1.5
N$8 [SIGNAL]: EPD_C2.1 J1.5
N$10 [SIGNAL]: EPD_C1.1 J1.4
N$11 [SIGNAL]: EPD_C6.1 J1.18
N$14 [SIGNAL]: J2.A5 R2-USB1.2
N$15 [SIGNAL]: EPD_C8.1 J1.20
N$16 [SIGNAL]: EPD_C7.1 J1.19
N$18 [SIGNAL]: EPD_C10.1 J1.22
N$20 [SIGNAL]: EPD_C12.1 J1.24
N$22 [SIGNAL]: D7.1 R_CAPACITOR.2
PREVGH [POWER]: D5.1 EPD_C9.1 J1.21
PREVGL [POWER]: D4.2 EPD_C11.1 J1.23
RESE [SIGNAL]: J1.3 Q3.2 R3.2
RESE' [SIGNAL]: R2.2 R3.1 SJ1.2
RESET [SIGNAL]: C5.1 IC1.1 R_RESET.2 RESET_BUTTON.3 RESET_BUTTON.4 U2.3
RTC_RST [SIGNAL]: U2.16 U3.4
RX [SIGNAL]: TP2.TP U2.24
SCK [SIGNAL]: D10.1 J1.13 J4.P5 R6.1 TP8.TP U1.6 U2.6
SCL [SIGNAL]: J3.4 R2-PINH.1 SENSOR2.4 U2.20 U3.16 U4.7
SDA [SIGNAL]: J3.3 R1_PINH.1 SENSOR2.3 U2.19 U3.15 U4.8
SRC [SIGNAL]: C4.2 D5.2 L1.1 Q3.3
SS_SD [SIGNAL]: D8.1 J4.P2 R10.1 U2.4
TX [SIGNAL]: TP1.TP U2.25
USB_D+ [SIGNAL]: D1.1 U2.14
USB_D- [SIGNAL]: D1.3 U2.13
VBAT [POWER]: C2_BAT.1 MCP73831.3 Q1.3 TP3.TP U4.2 U4.3
VBUS [POWER]: C1_BAT.1 C4_USB.1 C5_USB.1 CHG_LED.A D1.5 D2.2 MCP73831.4 PFMF.050.1.2 Q1.1 R1_PWRUSB.2 TP14.TP
VRTC [POWER]: C8.1 C10_SUPERCAP.2 R_CAPACITOR.1 U3.14
VUSB [POWER]: J2.A4 J2.A9 J2.B4 J2.B9 PFMF.050.1.1

## Tracks (layer width: path | path; a pad name or v marks a point on that pad's centre or on a via)
3V3  (via drill 0.3)
  Top 0.3: 128.39,41.48 130.47,41.48 131.02,40.93 C3.+ 131.16,40.79 131.71,40.23 134.55,40.23 C1_BAT2.1 134.69,40.23 135.18,40.23 156.64,18.77 164.91,18.77 J3.2 | 128.39,41.48 127.56,41.48 IC4.5 | R1.1 16,32.27 16,31.79 19.18,28.6 19.67,28.6 TP16.TP | U2.2 9.21,43.56 9.21,38.43 15.3,32.34 15.79,32.34 R1.1 | 27.52,46.84 25.35,44.67 25.35,41 22.91,38.55 | 27.52,46.84 32.69,52.01 32.83,52.01 U1.3 32.96,52.08 33.45,52.08 34.56,53.18 34.56,55.05 34.9,55.4 39.13,55.4 40.03,54.5 40.23,54.5 40.3,54.57 U1.8 40.72,54.43 40.72,53.32 U1.7 40.86,53.32 41.13,53.32 41.2,53.25 44.32,53.25 44.53,53.46 47.23,53.46 | 22.91,38.55 16.76,32.41 16.07,32.41 R1.1 | R_CL1.1 57.96,19.11 57.96,19.67 68.97,30.68 71.95,30.68 72.02,30.75 R8.2 72.16,30.68 72.92,30.68 | 72.92,30.68 74.31,30.68 78.32,26.66 81.3,26.66 Q2.3 | 7.41,100.34 7.41,91.34 6.72,90.65 5.82,90.65 5.75,90.58 J4.P4 | 7.41,100.34 7.41,102.45 | 7.41,102.45 7.41,104.25 C9.1 | 7.41,100.34 9.9,100.34 17.04,107.48 19.8,107.48 R_BOOT.1 19.94,107.41 20.71,107.41 21.54,106.58 45.22,106.58 | 90.09,59.97 90.86,59.97 R1_PINH1.2 91,60.11 91,62.95 90.09,63.85 90.09,64.4 R2-PINH1.2 90.03,64.54 90.03,65.09 86.28,68.83 83.72,68.83 D7.2 83.58,68.9 83.03,68.9 59.21,92.73 47.99,92.73 47.85,92.59 47.37,92.59 IC1.2 47.16,92.59 46.6,92.59 45.22,93.97 45.22,106.51 | 90.09,59.97 87.6,59.97 86.49,58.86 86.49,58.31 U3.2 86.42,58.17 86.42,57.76 v85.84,57.17 | 45.22,106.51 45.22,106.58 | 45.22,106.58 45.22,108.79 R_CHANGE.1 | R_RESET.1 58.62,109.2 58.62,106.51 45.22,106.51 | v72.92,30.82 72.92,30.68 | 47.23,53.46 62.39,53.46 v72.37,43.49
  Top 0.3: 128.39,41.48 128.39,38.09 122.36,32.06 115.44,32.06 94.53,52.98 94.53,54.02 90.58,57.96 90.37,57.96 90.09,58.24 90.09,59.97 | R9.2 44.28,33.41 R5.2 28.05,33.41 22.91,38.55 | 7.41,102.45 7.46,102.5 R7.2 | R10.2 31.53,44.68 30.93,44.08 30.2,44.08 27.52,46.76 27.52,46.84 | R6.2 46.41,52.64 47.23,53.46
  Bottom 0.3: v72.92,30.82 72.92,38.85 72.57,39.2 72.57,43.35 | 72.57,43.35 72.57,43.91 v85.84,57.17 | v72.37,43.49 72.44,43.42 72.57,43.35
32KHZ  (via drill 0.3)
  Top 0.15: v88.78,60.52 88.78,64.4 R2-PINH1.1 | v88.43,59.28 87.74,58.59 87.74,58.31 U3.1 | v18.56,42.45 18.14,42.87 18.14,43.56 U2.9 | v29.64,53.53 v25.9,49.79
  Bottom 0.15: v88.78,60.52 88.78,59.62 v88.43,59.28 59.97,59.28 54.22,53.53 v29.64,53.53 | v25.9,49.79 v18.56,42.45
DN  (via drill 0.3)
  Top 0.15: J2.B7 162.18,53.6 161.63,53.6 161.42,53.81 161.42,54.29 161.7,54.57 162.18,54.57 J2.A7 162.25,54.57 v163.15,54.57 | v160.52,51.94 160.52,51.8 157.89,49.17 155.74,49.17 D1.4
  Bottom 0.15: v163.15,54.57 v160.52,51.94
DP  (via drill 0.3)
  Top 0.15: 163.15,54.08 163.29,54.08 163.64,54.43 163.64,54.71 163.29,55.05 162.25,55.05 J2.B6 | 163.15,54.08 162.25,54.08 J2.A6 | v159.21,51.11 155.74,51.11 D1.6 | v163.15,53.95 163.15,54.08
  Bottom 0.15: v159.21,51.11 160.31,51.11 v163.15,53.95
EPD_3V3
  Top 0.3: Q2.2 79.29,25.62 79.84,25.62 81.44,24.03 81.44,23.89 TP17.TP 81.58,23.96 83.93,23.96 84.62,24.65 84.62,25.14 C7.1 | J1.16 83.58,14.75 84,14.75 J1.15 84.07,14.89 84.07,15.03 83.93,15.17 83.93,15.37 87.88,19.32 91.55,19.32 91.83,19.6 91.83,20.2 EPD_C5.1 91.98,20.15 92.59,20.15 92.93,20.5 92.93,22.02 89.89,25.07 84.9,25.07 84.69,25.28 C7.1 | L1.2 84.55,28.18 84.55,25.35 C7.1
EPD_3V3_C
  Top 0.3: 57.13,18.49 57.48,18.14 58.93,18.14 59.21,18.42 59.21,19.04 R_CL1.2 | 57.13,18.49 57.13,19.67 70.29,32.83 73.41,32.83 78.53,27.7 79.08,27.7 79.22,27.56 Q2.1 | U2.18 20.64,61.08 20.64,60.18 13.5,53.05 11.77,53.05 6.99,48.27 6.99,44.6 6.92,44.53 6.92,43.28 6.99,43.21 6.99,43 6.92,42.94 6.92,38.5 26.52,18.91 26.52,18.07 TP13.TP 26.66,18 27.49,18 27.91,18.42 56.99,18.42 57.13,18.49
EPD_BUSY  (via drill 0.3)
  Top 0.15: v87.06,13.16 87.05,13.18 87.05,14.68 J1.9 | v12.12,58.31 11.11,59.32 11.11,63.94 TP9.TP 10.49,64.04 U2.26
  Bottom 0.15: v87.06,13.16 86.73,13.49 76.11,13.49 39.33,50.28 20.15,50.28 v12.12,58.31
EPD_CS  (via drill 0.3)
  Top 0.15: v23.55,39.96 20.71,42.8 20.71,43.56 U2.11 | v34.62,38.23 34.76,38.09 TP10.TP 36.08,38.09 39.75,38.09 41.13,39.47 42.38,39.47 43.14,38.71 43.14,37.81 43.63,37.33 44.04,37.33 D6.1 44.11,37.26 44.11,34.9 44.32,34.69 R9.1 44.39,34.62 44.46,34.56 44.94,34.56 v45.22,34.28 | v71.26,17.73 75.21,17.73 79.78,13.15 84.43,13.15 85.52,14.25 85.52,14.68 J1.12
  Bottom 0.15: v23.55,39.96 32.89,39.96 v34.62,38.23 | v71.26,17.73 61.77,17.73 v45.22,34.28
EPD_DC  (via drill 0.3)
  Top 0.15: v35.52,17.87 36.15,17.24 75.28,17.24 79.64,12.88 84.71,12.88 86.08,14.25 86.08,14.68 J1.11 | v16.14,37.26 16,37.4 14.82,37.4 TP11.TP 14.82,37.46 14.82,37.95 13.02,39.75 13.02,43.56 U2.5
  Bottom 0.15: v16.14,37.26 v35.52,17.87
EPD_RST  (via drill 0.3)
  Top 0.15: v85.51,13.05 85.64,13.05 86.56,13.97 86.56,14.68 J1.10 | v4.02,36.42 3.88,36.56 2.61,36.56 TP12.TP | v12.12,57.69 14.13,57.69 16.83,60.39 16.83,61.08 U2.21
  Bottom 0.15: v85.51,13.05 84.67,12.21 28.23,12.21 v4.02,36.42 4.02,36.49 13.15,45.63 13.15,56.66 v12.12,57.69
FLASH_CS  (via drill 0.3)
  Top 0.15: R5.1 42.1,34.76 42.1,36.22 41.83,36.49 41.83,36.91 D9.1 41.69,36.98 41.34,36.98 v40.3,38.02 | 28.91,49.41 24.17,44.67 22.3,44.67 21.95,44.32 21.95,43.63 U2.12 | 28.91,49.41 32.13,52.63 33.45,52.63 33.79,52.98 33.79,53.6 33.52,53.88 33.45,53.88 32.96,54.36 32.96,54.5 U1.1 | 28.91,49.41 v29.02,49.31
  Bottom 0.15: v29.02,49.31 v40.3,38.02
GDR
  Top 0.15: J1.2 90.58,14.68 90.58,14.13 89.05,12.59 79.51,12.59 76.94,15.17 70.77,15.17 69.94,16 Q3.1 70.08,15.79 69.94,15.65 69.94,15.37 65.45,10.88 R4.1
GND  (via drill 0.35)
  Top 0.3: U2.29_6 13.71,52.01 13.71,50.83 U2.29_5 U2.29_4 | v34.53,46.35 33.39,46.35 D8.2 | v58.03,107.43 v58.02,107.44 53.5,107.44 | RESET_BUTTON.1 62.23,107.51 v61.26,106.54 | v151.67,50.13 D1.2 | U4.6 137.56,60.65 U4.9 | 52.06,107.39 51.96,107.29 | v42.64,38.33 42.22,37.91 41.76,38.36 D9.2 | 13.83,98.78 D11.2 11.6,100.8 v11.55,100.8 | v10.55,101.8 10.55,105.58 C9.2 | 13.16,101.5 13.31,101.35 | D3.1 v82.14,41.22 | v83.62,43.25 83.62,48.64 U3.13 | EPD_C1.2 75.14,26.87 v76.34,25.67 | v77.29,24.73 v77.28,24.73 80.18,21.83 EPD_C12.2 | R2.1 75.31,4.84 75.42,4.95 75.42,9.02 v74.67,9.77 | v74.86,11.25 75.83,12.22 J1.MP2 | v11,53.49 11,54.96 10.22,55.74 9.37,55.74 v7.79,57.32 | v7.94,59.76 7.98,59.8 7.98,61.05 U2.28 | J1.17 83.05,15.28 v85.68,17.91 | v87.58,16.01 87.58,14.75 J1.8
  Bottom 0.3: v34.53,46.35 34.53,46.3 42.5,38.33 v42.64,38.33 | v61.26,106.54 58.92,106.54 v58.03,107.43 | R2-USB.2 150.22,48.2 150.22,48.62 151.67,50.07 v151.67,50.13 | v11.55,100.8 v10.55,101.8 | v83.62,43.25 82.14,41.77 v82.14,41.22 | v76.34,25.67 v77.28,24.73 | v74.86,11.25 74.86,9.96 v74.67,9.77 | v7.94,59.76 7.94,57.47 v7.79,57.32 | U2.29_3 v11,53.49 | v85.68,17.91 v87.58,16.01
  other vias: 59.77,107.55 5.62,77.06 82.77,67.26 17.37,69.74 18.36,58.67 22.49,49.28 25.11,47.86 18.62,36.21 24.15,41.07 18.5,40.88 13.34,59.16 142.57,19.19 145.89,45.7 121.17,32.8 126.18,37.27 69.75,36.23 70.66,14.19 53.84,57.94 55.84,35.13 65.34,60.32 75.7,15.67 65.62,11.72
  pour Top: -19.77,-36.57 211.87,-36.57 215.72,-32.72 215.72,139.77 215.12,140.37 -22.27,140.37 -20.02,-36.32
  pour Bottom: -19.14,-35.64 -19.12,-35.62 214.82,-35.62 215.42,-35.02 215.42,140.77 215.17,141.02 -22.27,141.02 -19.38,-35.87
GPIO8
  Top 0.15: R1.2 15.93,33.66 15.93,36.42 19.11,39.61 19.11,43.35 19.32,43.56 U2.10
I2C_PW
  Top 0.3: R2-PINH.2 149.16,13.92 148.06,13.92 R1_PINH.2 147.92,13.92 146.95,13.92 C2.1 145.77,13.85 C1.1 145.63,13.85 144.8,13.85 136.22,22.44 135.25,22.44 135.11,22.3 134.97,22.23 | 133.38,22.64 133.38,21.4 SENSOR2.8 | 133.96,23.23 134.28,23.55 134.28,23.68 134.21,23.75 134.21,24.24 SENSOR2.2 | 133.96,23.23 133.38,22.64 | 134.97,22.23 134.97,21.4 SENSOR2.6 | 133.96,23.23 134.97,22.23 | U2.17 21.95,61.08 21.95,60.25 22.58,59.62 66.27,59.62 90.3,35.59 111.28,35.59 124.17,22.71 133.24,22.71 133.38,22.64
INT_RTC  (via drill 0.3, 0.35)
  Top 0.15: 17.11,41.76 16.83,42.03 16.83,43.56 U2.8 | 17.11,41.76 17.11,40.93 16.62,40.44 16.62,39.89 TP15.TP | v84.83,59.76 85.18,59.42 85.18,58.31 U3.3 | v20.98,45.57 v27.77,52.35 | v17.87,42.45 17.17,41.76 17.11,41.76
  Top 0.152: U3.3 85.19,57.16 85.63,56.73 90.5,56.73 v90.61,56.84 | v92.19,57.47 92.19,57.52 R1_PINH1.1
  Bottom 0.15: v84.83,59.76 35.18,59.76 v27.77,52.35 | v17.87,42.45 v20.98,45.57
  Bottom 0.152: v92.19,57.47 91.24,57.47 v90.61,56.84
IO/BOOT  (via drill 0.3)
  Top 0.15: R_BOOT.2 19.88,108.79 21.12,108.79 21.68,109.35 22.23,109.35 BOOT_BUTTON.4 22.3,109.42 23.34,109.42 23.89,108.86 24.65,108.86 25.14,109.35 25.76,109.35 BOOT_BUTTON.3 25.83,109.35 26.38,109.35 26.97,108.76 26.97,107.72 27.11,107.58 v27.01,107.48 28.34,108.81 38.16,108.81 C6.1 | v25.55,106.02 24.45,104.91 24.45,61.15 U2.15
  Bottom 0.15: v27.01,107.48 v25.55,106.02
IO/CHANGE  (via drill 0.3)
  Top 0.15: C10.1 53.32,108.72 51.87,108.72 51.31,109.28 50.69,109.28 CHANGE_BUTTON.3 50.62,109.28 50.07,109.28 49.17,108.38 48.68,108.38 47.78,109.28 47.23,109.28 CHANGE_BUTTON.4 46.92,109.6 44.76,109.6 R_CHANGE.2 42.91,108.86 v41.43,107.39 | v17.38,78.53 17.38,71.88 14.34,68.83 14.34,61.15 U2.23
  Bottom 0.15: v17.38,78.53 17.38,83.34 v41.43,107.39
MISO  (via drill 0.3)
  Top 0.15: v71.19,32.27 71.4,32.06 72.02,32.06 R8.1 | v57.82,56.51 57.34,56.99 56.99,56.99 D12.1 56.92,57.06 34.28,57.06 32.13,54.91 32.13,53.32 | 32.13,53.32 30.47,53.32 28.75,57.31 TP6.TP 27.72,58.17 23.13,58.17 v22.99,58.03 | 32.13,53.32 32.89,53.32 U1.2 | v16.9,57.2 10.18,57.2 9.21,58.17 U2.27 9.21,61.15 9.21,61.77 v8.79,62.19 | v6.86,92.45 6.99,92.59 6.99,93.56 6.79,93.76 5.96,93.76 J4.P7
  Bottom 0.15: v71.19,32.27 71.19,43.14 v57.82,56.51 | v16.9,57.2 22.16,57.2 v22.99,58.03 | v6.86,92.45 8.79,90.51 v8.79,62.19
MOSI  (via drill 0.3)
  Top 0.15: v9.97,101.17 9.9,101.24 9.14,101.24 R7.1 | v10.53,99.31 11.39,98.44 D11.1 10.95,98.42 10.66,98.13 10.66,93.42 6.89,89.64 | 6.89,89.64 6.72,89.47 5.96,89.47 J4.P3 | TP7.TP 15.58,41.69 15.58,43.56 U2.7 15.58,43.63 15.58,44.32 16.34,45.08 23.96,45.08 v29.64,50.76 | v83.3,13.95 84.45,13.95 84.55,14.06 84.55,14.68 J1.14 | v41.55,50.62 41.41,50.76 40.79,50.76 U1.5 | 6.89,89.64 17.87,78.67 v17.87,62.19
  Bottom 0.15: v9.97,101.17 9.97,99.86 v10.53,99.31 | v83.3,13.95 78.22,13.95 v41.55,50.62 41.48,50.62 41.34,50.76 v29.64,50.76 21.74,50.76 15.93,56.58 15.93,56.85 17.87,58.79 v17.87,62.19
N$1  (via drill 0.3)
  Top 0.15: v155.74,48.48 155.12,48.48 155,48.35 R2-USB.1 | v163.15,55.88 163.01,56.02 162.25,56.02 J2.B5
  Bottom 0.15: v163.15,55.88 v155.74,48.48
N$2
  Top 0.15: R1_BAT.1 123.82,57.48 124.3,57.48 128.53,53.25 128.53,51.8 129.08,51.24 129.08,51.11 129.29,50.9 129.98,50.9 MCP73831.1
N$3  (via drill 0.3)
  Top 0.15: D2.1 122.16,35.46 122.16,36.77 124.51,39.13 124.51,39.4 124.65,39.54 IC4.3 124.44,39.33 123.75,40.03 123.75,41.06 | 123.75,41.06 124.17,41.48 124.65,41.48 IC4.1 124.72,41.55 124.79,41.62 125.34,41.62 v125.55,41.83 | C1_BAT1.1 117.79,42.73 122.02,42.73 123.68,41.06 123.75,41.06 | v137.32,45.08 138.43,45.08 Q1.2
  Bottom 0.15: v137.32,45.08 128.81,45.08 v125.55,41.83
N$4  (via drill 0.3)
  Top 0.15: v129.01,53.39 130.19,54.57 130.19,57.55 R2_BAT.2 | v127.28,51.66 127.28,51.04 127.35,50.97 MCP73831.5
  Bottom 0.15: v127.28,51.66 v129.01,53.39
N$5
  Top 0.15: D4.1 91.83,27.56 91.83,27.77 94.6,30.54 94.6,32.62 C4.1 94.67,32.62 95.01,32.62 95.43,33.03 95.43,34.49 94.73,35.18 85.66,35.18 D3.2
N$6
  Top 0.15: CHG_LED.C 124.23,51.73 118.83,51.73 116.69,53.88 116.69,55.05 117.66,56.02 123.61,56.02 123.75,56.16 R1_BAT.2
N$7  (via drill 0.3)
  Top 0.15: v51.8,92.17 51.8,91 52.28,90.51 52.7,90.51 C_DELAY.1 | v50.83,93.28 50.62,93.49 50.07,93.49 IC1.5
  Bottom 0.15: v51.8,92.17 51.8,92.31 v50.83,93.28
N$8
  Top 0.15: 72.57,10.53 88.29,10.53 91.83,14.06 91.83,15.44 91.27,16 89.4,16 89.06,15.65 89.06,14.75 J1.5 | 69.25,7.2 68.05,7.2 EPD_C2.1
  Top 0.3: 72.57,10.53 72.57,6.05 72.03,5.51 70.91,5.51 69.25,7.17 69.25,7.2
N$10  (via drill 0.3)
  Top 0.15: v89.54,15.51 89.54,14.75 J1.4 | v74.25,27.57 74.28,27.54 EPD_C1.1
  Bottom 0.15: v89.54,15.51 85.52,15.51 82.13,18.91 82.06,18.91 74.25,26.72 v74.25,27.57
N$11  (via drill 0.3)
  Top 0.15: v86.7,18.91 86.01,18.91 82.48,15.37 82.55,15.3 82.55,14.75 J1.18 | v89.47,19.88 89.68,20.08 89.92,20.08 EPD_C6.1
  Bottom 0.15: v86.7,18.91 88.5,18.91 v89.47,19.88
N$14
  Top 0.15: R2-USB1.2 158.72,55.95 159.07,55.95 161.42,58.31 161.49,58.31 161.77,58.03 162.74,58.03 162.81,58.1 163.43,58.1 164.05,57.48 164.05,54.08 163.01,53.05 162.25,53.05 J2.A5
N$15
  Top 0.15: J1.20 81.58,14.75 81.58,15.37 85.59,19.39 85.66,19.39 86.42,20.15 86.62,20.15 EPD_C8.1
N$16
  Top 0.15: J1.19 82.06,14.75 82.06,15.37 86.08,19.39 87.39,19.39 87.67,19.67 87.67,19.8 87.88,20.01 88.33,20.01 EPD_C7.1
N$18
  Top 0.15: J1.22 80.54,14.75 80.54,16.9 83.45,19.8 83.45,20.08 EPD_C10.1
N$20
  Top 0.15: J1.24 79.5,14.75 79.5,18.84 80.47,19.8 80.47,20.51 EPD_C12.1
N$22
  Top 0.15: R_CAPACITOR.2 93.76,53.39 93.76,53.88 91.27,56.37 85.32,56.37 84.55,57.13 84.55,59.42 81.85,62.12 81.85,68.63 81.65,68.83 D7.1
PREVGH  (via drill 0.3)
  Top 0.3: J1.21 81.09,14.75 81.09,15.23 81.16,15.3 81.16,15.37 81.02,15.51 81.02,15.65 84.97,19.6 85.06,20.11 EPD_C9.1 85.17,20.22 85.66,20.22 v85.87,20.43 | v92.38,30.89 92.38,31.65 D5.1
  Bottom 0.3: v92.38,30.89 92.38,26.94 v85.87,20.43
PREVGL  (via drill 0.3)
  Top 0.3: 81.75,19.49 81.85,19.6 81.85,20.01 81.98,20.14 EPD_C11.1 | 81.75,19.49 80.05,17.8 80.05,15.37 79.98,15.3 79.98,15.1 80.05,15.03 80.05,14.75 J1.23 | v88.22,26.73 88.22,27.49 D4.2 | v82.2,19.39 82.13,19.32 81.92,19.32 81.75,19.49
  Bottom 0.3: v88.22,26.73 88.22,25.41 v82.2,19.39
RESE
  Top 0.15: J1.3 90.03,14.75 90.03,15.3 90.23,15.51 91.34,15.51 91.55,15.3 91.55,14.2 89.65,12.3 79.39,12.3 77.14,14.54 74.03,14.54 73.82,14.34 73.82,13.78 73.75,13.71 R3.2 73.68,13.64 73.47,13.43 70.77,13.43 69.87,12.53 68.7,12.53 68.56,12.4 67.73,12.4 | 67.52,14.89 69.6,16.97 70.29,16.97 70.57,16.69 70.57,16.55 71.05,16.07 71.19,16.07 Q3.2
  Top 0.3: 67.52,14.89 64.82,12.19 64.82,10.26 64.98,10.09 65.92,10.09 67.73,11.9 67.73,12.4
RESE'
  Top 0.15: 66.24,8.55 65.12,7.79 SJ1.2 | R3.1 74.99,13.35 71.47,11.95 R2.2
  Top 0.3: R2.2 71.37,6.14 68.96,8.55 66.24,8.55
RESET  (via drill 0.3)
  Top 0.15: C5.1 67.45,108.52 67.17,108.52 66.34,109.35 65.79,109.35 RESET_BUTTON.3 65.72,109.35 65.09,109.35 64.4,108.65 64.4,108.58 64.19,108.38 63.85,108.38 62.88,109.35 62.26,109.35 RESET_BUTTON.4 62.19,109.35 61.63,109.35 61.01,108.72 61.01,108.58 | 61.01,108.58 61.01,107.34 59.76,106.09 59.49,106.09 47.23,93.83 IC1.1 47.16,93.56 v46.4,93.56 | 61.01,108.58 59.83,108.58 R_RESET.2 | v10.46,44.94 10.46,43.63 U2.3
  Bottom 0.15: v10.46,44.94 10.46,57.62 v46.4,93.56
RTC_RST  (via drill 0.35)
  Top 0.152: v72.74,63.63 72.74,57.99 74.52,56.21 83.45,56.21 83.92,56.69 U3.4 | v22.82,62.21 23.22,61.81 23.19,61.78 U2.16
  Bottom 0.152: v72.74,63.63 23.23,63.63 22.82,63.22 v22.82,62.21
RX  (via drill 0.3)
  Top 0.15: v13.02,68.07 13.02,61.15 U2.24 | v15.86,71.74 16,71.88 16,73.06 TP2.TP
  Bottom 0.15: v13.02,68.07 13.02,68.9 v15.86,71.74
SCK  (via drill 0.3)
  Top 0.15: v84.9,15.51 85.04,15.37 85.04,14.75 J1.13 | v65.79,33.86 65.16,34.49 64.54,34.49 TP8.TP 64.47,34.56 64.13,34.9 63.5,34.9 59.9,38.5 59.49,38.5 | 59.49,38.5 D10.1 | v26.66,51.87 21.88,51.87 14.34,44.32 14.34,43.63 U2.6 | v39.89,51.87 40.03,52.01 40.65,52.01 U1.6 40.79,52.01 44.41,52.01 R6.1 57.92,38.5 59.49,38.5 | v16.41,56.72 10.25,56.72 6.99,59.97 6.99,61.29 4.57,63.71 4.57,91.06 5.12,91.62 5.89,91.62 J4.P5
  Bottom 0.15: v84.9,15.51 66.55,33.86 v65.79,33.86 | v39.89,51.87 v26.66,51.87 26.59,51.87 21.74,56.72 v16.41,56.72
SCL  (via drill 0.3, 0.35)
  Top 0.15: v139.05,47.02 139.05,61.08 138.99,61.15 138.36,61.15 U4.7 | SENSOR2.4 135.8,24.31 135.8,24.93 v136.01,25.14 139.19,25.14 150,14.34 150,13.99 | 150,13.99 150,12.88 149.72,12.6 149.23,12.6 R2-PINH.1 | v156.16,20.01 156.92,20.77 164.91,20.77 J3.4 | v150.13,13.99 150,13.99 | v19.67,59.97 18.56,59.97 18.14,60.39 18.14,61.08 U2.20
  Top 0.152: U3.16 87.73,50.33 v92.05,54.64
  Bottom 0.15: v136.01,25.14 139.05,28.18 v139.05,47.02 140.16,47.02 140.51,47.37 140.51,47.64 127.14,61.01 103.44,61.01 36.01,61.01 34.97,59.97 v19.67,59.97 | v150.13,13.99 v156.16,20.01
  Bottom 0.152: v92.05,54.64 97.07,54.64 103.44,61.01
SDA  (via drill 0.3, 0.35)
  Top 0.15: v138.57,45.91 139.54,46.88 139.54,61.08 138.92,61.7 138.71,61.7 138.64,61.63 138.36,61.63 U4.8 138.22,61.63 138.08,61.77 138.08,61.98 v137.88,62.19 | SENSOR2.3 134.97,24.31 134.97,24.93 v135.18,25.14 135.25,25.14 135.73,25.62 139.12,25.62 150.62,14.13 150.62,13.99 | 150.62,13.99 150.62,12.74 149.72,11.84 148.4,11.84 147.99,12.26 147.99,12.53 R1_PINH.1 | v156.71,19.74 164.91,19.74 J3.3 | v150.76,13.99 150.62,13.99 | v23.83,62.8 20.42,62.8 19.39,61.77 19.39,61.15 U2.19
  Top 0.152: U3.15 86.47,51.09 86.44,51.12 90.98,55.66 v90.98,55.7 | v94.87,55.7 v100.66,61.49
  Bottom 0.15: v138.57,45.91 138.57,28.53 v135.18,25.14 | v156.71,19.74 156.5,19.74 v150.76,13.99 | v137.88,62.19 101.29,62.19 | 101.29,62.8 v23.83,62.8
  Bottom 0.152: v90.98,55.7 v94.87,55.7 | v100.66,61.49 101.29,62.12 101.29,62.19 101.29,62.8
SRC  (via drill 0.3)
  Top 0.15: C4.2 94.6,34 91.83,34 89.47,31.65 88.99,31.65 D5.2 88.92,31.72 86.01,31.72 84.97,32.76 84.55,32.76 | v77.77,26.45 70.64,19.32 70.64,18.21 Q3.3 | v81.12,29.91 83.97,32.76 84.48,32.76 | L1.1 84.48,32.76 | L1.1 84.48,32.76 | L1.1 84.55,32.76 | L1.1 84.55,32.76
  Bottom 0.15: v81.12,29.91 77.77,26.55 v77.77,26.45
SS_SD  (via drill 0.3)
  Top 0.15: D8.1 33.24,47.92 33.17,47.85 31.58,47.85 R10.1 31.51,47.78 31.44,47.71 30.89,47.71 v30.4,47.23 | v12.53,42.1 11.77,42.87 11.77,43.56 U2.4 11.7,43.63 11.7,44.32 v9.97,46.05 | v6.99,61.91 6.99,87.95 6.65,88.29 6.3,88.29 J4.P2
  Bottom 0.15: v12.53,42.1 17.59,42.1 17.73,41.97 22.51,41.97 27.77,47.23 v30.4,47.23 | v6.99,61.91 6.99,49.03 v9.97,46.05
TX
  Top 0.15: U2.25 11.77,61.15 11.77,68.21 13.09,69.53 TP1.TP
USB_D+  (via drill 0.3)
  Top 0.15: v140.02,47.51 143.62,51.11 153.11,51.11 D1.1 | v74.24,39.89 67.24,32.89 51.59,32.89 44.53,39.96 v33.52,39.96 | v24.79,42.45 24.58,42.66 24.58,43.49 24.52,43.56 U2.14
  Bottom 0.15: v140.02,47.51 81.85,47.51 v74.24,39.89 | v33.52,39.96 33.31,39.96 30.82,42.45 v24.79,42.45
USB_D-  (via drill 0.3)
  Top 0.15: v137.32,44.25 138.99,44.25 143.9,49.17 153.11,49.17 D1.3 | v73.13,39.4 71.95,39.4 65.72,33.17 51.73,33.17 44.46,40.44 v25.62,40.44 | v23.61,42.45 23.2,42.87 23.2,43.56 U2.13
  Bottom 0.15: v137.32,44.25 128.6,44.25 123.75,39.4 v73.13,39.4 | v23.61,42.45 v25.62,40.44
VBAT  (via drill 0.3)
  Top 0.3: U4.2 136.35,61.15 136.35,60.66 U4.3 136.22,60.73 136.15,60.73 135.94,60.94 135.8,60.94 | 135.8,60.94 134.55,62.19 134.55,62.81 134.14,63.23 134.14,64.06 TP3.TP | v123.47,51.11 123.2,50.83 123.2,50.21 C2_BAT.1 | v129.01,52.63 129.15,52.77 129.98,52.77 MCP73831.3 130.12,52.84 130.81,52.84 130.92,52.73 | 130.92,52.73 136.49,47.16 137.46,47.16 Q1.3 | 130.92,52.73 132.41,54.22 132.41,57.62 135.66,60.87 135.8,60.94
  Bottom 0.3: v123.47,51.11 127.49,51.11 v129.01,52.63
VBUS
  Top 0.3: 154.6,56.54 154.7,56.44 155.33,56.44 C5_USB.1 | 154.6,56.54 152.7,58.45 148.61,58.45 C4_USB.1 | 154.84,50.14 D1.5 | 154.84,50.14 154.36,50.62 154.36,56.3 154.6,56.54 | 154.84,50.14 154.7,50.07 154.63,50 154.63,49.1 148.82,43.28 148.82,41.34 PFMF.050.1.2 148.68,42.31 138.5,42.31 136.7,44.11 136.7,45.01 Q1.1 136.49,45.08 134.34,45.08 132.03,47.4 | R1_PWRUSB.2 112.19,38.43 112.19,37.53 115.99,33.73 115.99,33.59 TP14.TP 116.13,33.45 116.89,33.45 117.38,33.93 122.09,33.93 123.54,35.39 124.23,35.39 D2.2 124.1,35.52 124.1,37.6 126.59,40.1 126.59,41.97 132.03,47.4 | 126,52.39 126.38,52.77 127.35,52.77 MCP73831.4 127.56,52.84 127.77,52.63 127.77,52.01 128.46,51.31 128.46,50.97 132.03,47.4 | 126,52.39 125.83,52.22 125.83,51.73 CHG_LED.A | 126,52.39 123.89,54.5 117.45,54.5 C1_BAT.1
VRTC
  Top 0.3: 92.1,48.54 93.35,48.54 C10_SUPERCAP.2 | 92.1,48.54 90.72,48.54 C8.1 90.58,48.54 90.09,48.54 89.06,47.51 85.39,47.51 85.18,47.71 85.18,48.89 U3.14 | 92.1,48.54 92.1,51.73 92.52,52.15 92.52,53.32 R_CAPACITOR.1
VUSB
  Top 0.3: J2.A4 162.18,51.8 162.18,52.01 J2.B9 162.04,51.94 161.35,51.94 | J2.A9 162.18,56.78 162.18,56.58 J2.B4 162.04,56.65 161.35,56.65 161.01,56.3 161.01,52.28 161.35,51.94 | 161.35,51.94 161.21,51.87 156.23,46.88 156.23,44.8 153.32,41.9 153.32,41.34 PFMF.050.1.1